# EAGLE board Power_supply_board (EAGLE 6.3)
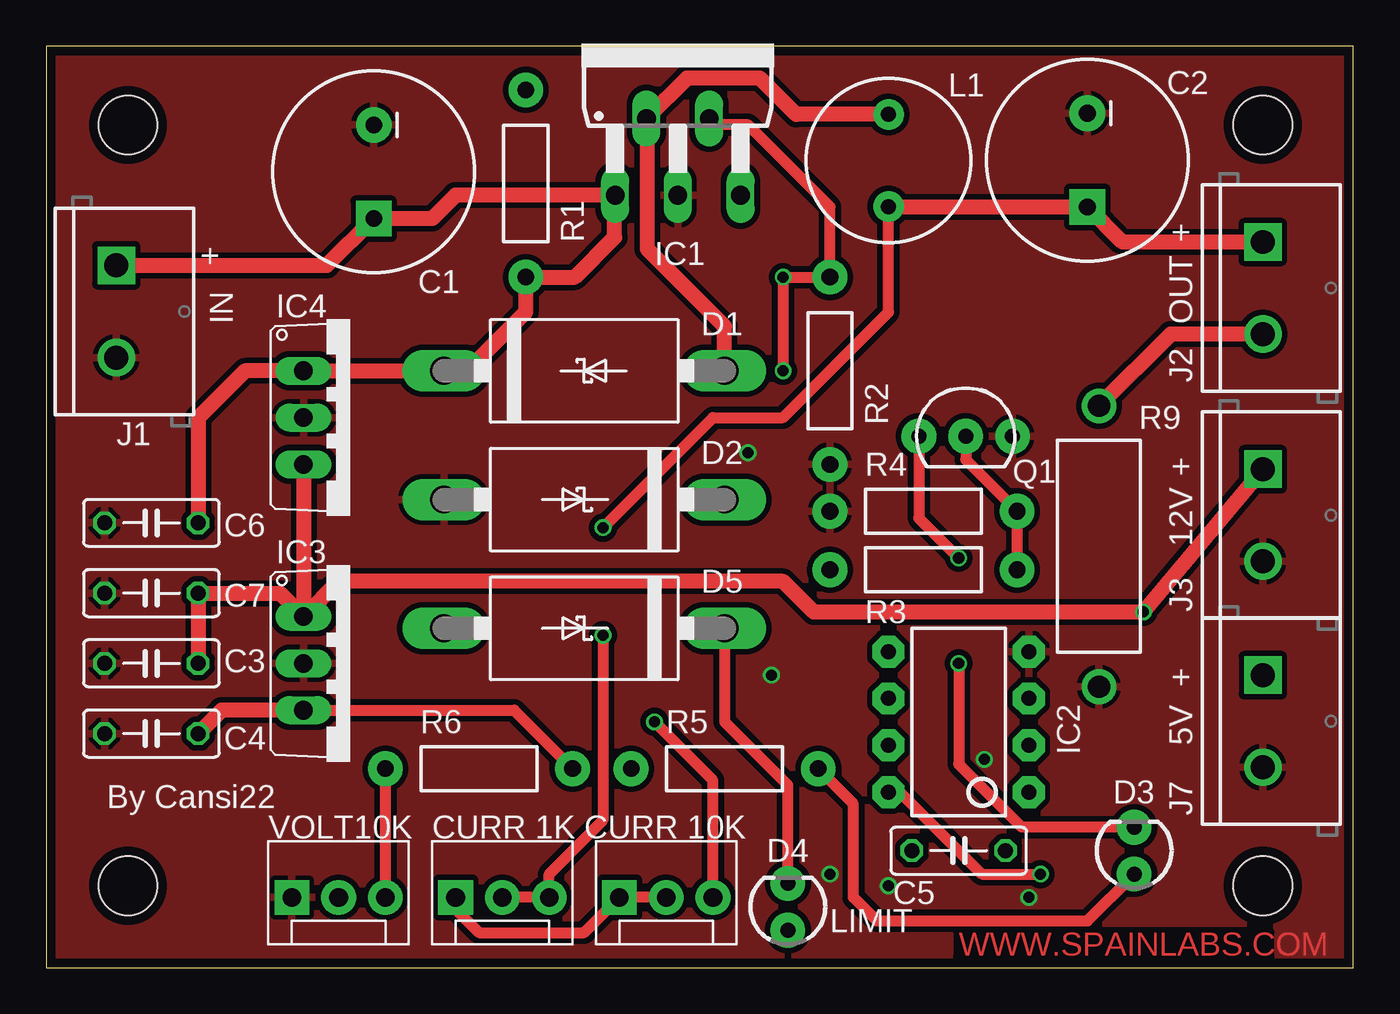
[diagram p0: board, top side]
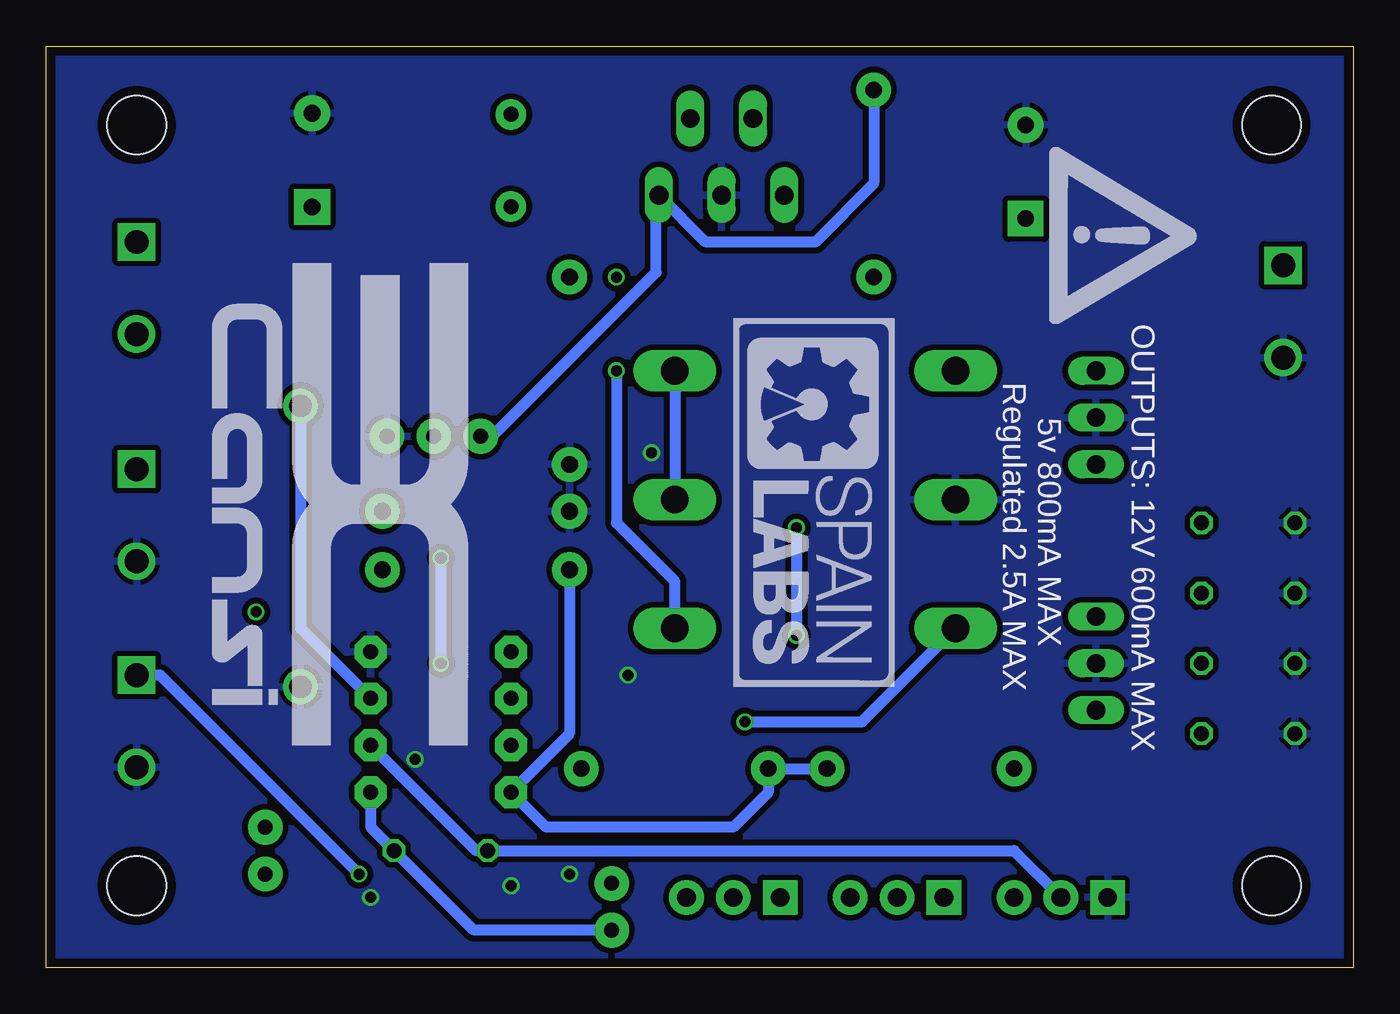
[diagram p1: board, bottom side, seen from below]

Size 70.95 x 50 mm. Coordinates in mm from the lower left corner, seen from the top.
Outline: 0,0 70.95,0 70.95,50 0,50 0,0
Copper layers (1*16): Top 0.035mm / dielectric 1.6mm / Bottom 0.035mm
Design rules "Elecrow_2-layer_PCB_eagle_rule": minimum track width 6mil, minimum drill 12mil, track to track 6mil, track to pad 6mil, pad to pad 6mil, via to via 8mil, smd to smd 0mil, copper to edge 20mil, drill to drill 10mil, minimum pad ring 6mil, minimum via ring 6mil, stop-mask expansion 0mil, vias tented up to drill 100mil, thermal gap 10mil
Holes 3.2 mm at 4.45,4.45 4.45,45.72 66.04,45.72 66.04,4.45

## Footprints (pad centres in the part's own frame; a part is rotated, then mirrored left to right if it is on the bottom)
CPOL-RADIAL-1000UF-25V = drill 0.9 pad 1.93 square: + 2.54,0 | drill 0.9 pad 1.93: - -2.54,0
C050-025X075 = drill 0.813 octagon: 1 -2.54,0; 2 2.54,0
DO201T15 = drill 1.499 long: A 7.62,0; C -7.62,0
LED3MM = drill 0.813 pad 1.88: A -1.27,0; K 1.27,0
T05D = drill 1.016 long: 1 -3.404,-5.08; 2 -1.702,-0.914; 3 0,-5.08; 4 1.702,-0.914; 5 3.404,-5.08
DIP08 = drill 0.813 pad 1.727 octagon: 1 -3.81,-3.81; 2 -1.27,-3.81; 3 1.27,-3.81; 4 3.81,-3.81; 5 3.81,3.81; 6 1.27,3.81; 7 -1.27,3.81; 8 -3.81,3.81
TO220V = drill 1.016 long: 1 -2.54,-2.54; 2 0,-2.54; 3 2.54,-2.54
SCREWTERMINAL-5MM-2 = drill 1.3 pad 2.032 square: 1 0,0 | drill 1.3 pad 2.032: 2 5,0
MOLEX-1X3 = drill 1.016 pad 1.88 square: 1 0,0 | drill 1.016 pad 1.88: 2 2.54,0; 3 5.08,0
RLB0912 = drill 0.813 pad 1.651: 1 2.502,0; 2 -2.502,0
TO-92-AMMO = drill 0.813 pad 1.88: 1 -2.54,0; 2 0,0; 3 2.54,0
AXIAL-0.4 = drill 0.9 pad 1.88: P$1 -5.08,0; P$2 5.08,0
AXIAL-0.6 = drill 1.2 pad 1.88: P$1 -7.62,0; P$2 7.62,0

## Placement (x,y rotation side)
C1  330uF  [CPOL-RADIAL-1000UF-25V]  17.78,43.18 270 top
C2  [CPOL-RADIAL-1000UF-25V]  56.52,43.81 270 top
C3  0.22uF  [C050-025X075]  5.71,16.51 180 top
C4  0.22uF  [C050-025X075]  5.71,12.7 180 top
C5  0.22uF  [C050-025X075]  49.53,6.35 0 top
C6  0.22uF  [C050-025X075]  5.71,24.13 180 top
C7  0.22uF  [C050-025X075]  5.71,20.32 180 top
D1  1N5822  [DO201T15]  29.21,32.38 0 top
D2  1N5822  [DO201T15]  29.21,25.4 180 top
D3  [LED3MM]  59.05,6.35 90 top
D4  LIMIT  [LED3MM]  40.26,3.3 90 top
D5  1N5822  [DO201T15]  29.21,18.41 180 top
E$1  [LOGOCANSIBOT]  62.23,12.06 90 top
E$2  [LOGOSLBOT]  33.66,15.24 90 top
IC1  LM2596T  [T05D]  34.29,46.99 0 top
IC2  LM358  [DIP08]  49.53,13.34 90 top
IC3  7805TV  [TO220V]  16.51,16.51 270 top
IC4  7812TV  [TO220V]  16.51,29.84 270 top
J1  IN  [SCREWTERMINAL-5MM-2]  3.81,38.1 270 top
J2  [SCREWTERMINAL-5MM-2]  66.04,39.37 270 top
J3  12V  [SCREWTERMINAL-5MM-2]  66.04,27.05 270 top
J4  CURR 1K  [MOLEX-1X3]  31.11,3.81 0 top
J5  CURR 10K  [MOLEX-1X3]  22.23,3.81 0 top
J6  VOLT 10K  [MOLEX-1X3]  13.34,3.81 0 top
J7  5V  [SCREWTERMINAL-5MM-2]  66.04,15.88 270 top
L1  33uH  [RLB0912]  45.72,43.79 90 top
Q1  BC548  [TO-92-AMMO]  49.91,28.83 0 top
R1  10K  [AXIAL-0.4]  26.04,42.55 90 top
R2  390  [AXIAL-0.4]  42.55,32.38 270 top
R3  2K2  [AXIAL-0.4]  47.62,21.59 180 top
R4  390  [AXIAL-0.4]  47.62,24.77 0 top
R5  390  [AXIAL-0.4]  36.83,10.79 0 top
R6  470K  [AXIAL-0.4]  23.5,10.79 0 top
R9  0.039  [AXIAL-0.6]  57.15,22.86 90 top
U$1  [WARNINGBOT]  16.51,34.92 90 top

## Library data of the parts
C1 C2 = SparkFun-Capacitors
C3-C7 D1 D2 D5 = adafruit
D3 D4 = SparkFun-LED; PROD_ID: DIO-08794
E$1 E$2 U$1 = untitled
IC1 = national-semiconductor; MPN: LM2596T-ADJ/LF02; OC_FARNELL: 9494162; OC_NEWARK: 65K5910
IC2 = SparkFun-AnalogIC; PROD_ID: IC-09172
IC3 IC4 = linear
J1-J3 J7 = SparkFun-Connectors; STOREFRONT_ID: PRT-08432
J4-J6 = SparkFun-Connectors
L1 R1-R6 R9 = SparkFun-Passives
Q1 = SparkFun-DiscreteSemi

## Nets
5V: C4.1 IC2.8 IC3.3 J7.1 R3.P$2 R5.P$1 R6.P$2
12V: C3.1 C7.1 IC3.1 IC4.3 J3.1
EN: D3.K IC1.5 Q1.1 R1.P$2
GND: C1.- C2.- C3.2 C4.2 C6.2 C7.2 D2.A IC1.3 IC2.4 IC3.2 IC4.2 J1.2 J3.2 J6.1 J7.2 Q1.3 R2.P$2 R4.P$1 R9.P$1
IN: C1.+ C6.1 D1.C IC1.1 IC4.1 J1.1 R1.P$1
LIMIT: D4.K D5.C IC1.4 R2.P$1
N$1: J4.1 J4.2 J5.1
N$2: D5.A J4.3
N$3: D1.A D2.C IC1.2 L1.1
N$6: Q1.2 R3.P$1 R4.P$2
N$8: C5.2 D4.A IC2.1
N$9: D3.A R5.P$2
N$10: J6.3 R6.P$1
N$11: C5.1 IC2.2 J6.2
OUT: C2.+ J2.1 J5.2 J5.3 L1.2
SHUNT: IC2.3 J2.2 R9.P$2

## Tracks (layer width: path | path; a pad name or v marks a point on that pad's centre or on a via)
5V  (via drill 0.6)
  Top 0.61: IC3.3 25.4,13.97 R6.P$2 | IC2.8 46.35,9.53 50.8,5.08 v53.98,5.08
  Top 0.813: IC3.3 9.53,13.97 C4.1
  Bottom 0.61: R6.P$2 R5.P$1 31.75,9.53 33.66,7.62 43.81,7.62 IC2.8 42.55,12.7 R3.P$2 | v53.98,5.08 64.77,15.88 J7.1
12V  (via drill 0.6)
  Top 0.813: IC4.3 IC3.1 | IC3.1 12.7,20.32 C7.1 C3.1 | IC3.1 15.88,20.95 40.01,20.95 41.66,19.3 v59.56,19.3 J3.1
EN  (via drill 0.6)
  Top 0.61: Q1.1 47.37,24.38 v49.53,22.23 | v49.53,16.51 49.53,11.05 52.96,7.62 D3.K
  Bottom 0.61: R1.P$2 26.04,42.55 29.21,39.37 35.15,39.37 IC1.5 37.85,41.76 37.85,37.72 46.74,28.83 Q1.1 | v49.53,22.23 v49.53,16.51
GND  (via drill 0.6)
  other vias: 53.34,3.81 45.72,4.45 42.55,5.08 39.37,15.88 50.93,11.3 38.1,27.94
  pour Top (isolate 0.305): 0,0 0,50.16 71.12,50.16 71.12,0
  pour Bottom (isolate 0.305): 0,50.16 71.12,50.16 71.12,0 0,0
IN
  Top 0.813: J1.1 15.24,38.1 C1.+ 20.95,40.64 22.23,41.91 IC1.1 30.86,41.88 30.86,39.62 28.7,37.47 R1.P$1 26.04,35.56 22.86,32.38 D1.C IC4.1 10.79,32.38 8.26,29.84 C6.1
LIMIT  (via drill 0.6)
  Top 0.61: IC1.4 36.35,45.72 38.1,45.72 42.55,41.27 R2.P$1 v40.01,37.47 v40.01,32.38 | D5.C 36.83,13.34 40.26,9.91 D4.K
  Bottom 0.61: D5.C 36.83,20.95 40.01,24.13 v40.01,32.38
N$1
  Top 0.61: J4.2 J4.1 29.21,1.91 23.5,1.91 22.23,3.17 J5.1
N$2  (via drill 0.6)
  Top 0.61: J4.3 36.2,10.16 v33.02,13.34
  Bottom 0.61: v33.02,13.34 26.67,13.34 D5.A
N$3
  Top 0.813: L1.1 40.7,46.29 38.73,48.26 34.77,48.26 IC1.2 32.64,46.02 32.64,38.99 36.83,34.8 D1.A
  Bottom 0.61: D1.A D2.C
N$6
  Top 0.61: R3.P$1 R4.P$2 49.91,27.56 Q1.2
N$8
  Bottom 0.61: IC2.1 53.34,7.62 C5.2 47.75,2.03 D4.A
N$9
  Top 0.61: R5.P$2 43.81,8.89 43.81,3.81 45.09,2.54 56.52,2.54 D3.A
N$10
  Top 0.61: J6.3 R6.P$1
N$11
  Bottom 0.61: J6.2 18.41,6.35 C5.1 47.62,6.35 IC2.2
OUT  (via drill 0.6)
  Top 0.61: J5.2 J5.3 27.3,5.08 30.23,8 v30.23,18.03 | v30.23,23.88 36.2,29.84 40.01,29.84 45.72,35.56 L1.2
  Top 0.813: L1.2 45.73,41.27 C2.+ 58.42,39.37 J2.1
  Bottom 0.61: v30.23,23.88 v30.23,18.03
SHUNT
  Top 0.813: J2.2 61.04,34.37 R9.P$2
  Bottom 0.61: R9.P$2 57.15,18.41 IC2.3

## Text on the board
Top: WWW.SPAINLABS.COM
tPlace: By Cansi22
tNames: + | + | IN | OUT | + | 12V | + | 5V | VOLT10K | CURR 1K | CURR 10K | LIMIT
bNames: OUTPUTS: 12V 600mA MAX | Regulated 2.5A MAX | 5v 800mA MAX